# Altium PCB BSPD.PcbDoc
Units mil, origin at the board's own origin, x right, y up, seen from the top; angles counter-clockwise.
Board outline 2490 x 2755 mil, 2 copper layers (Top Layer, Bottom Layer); 27 components, 24 nets, 121 pads, 0 vias.
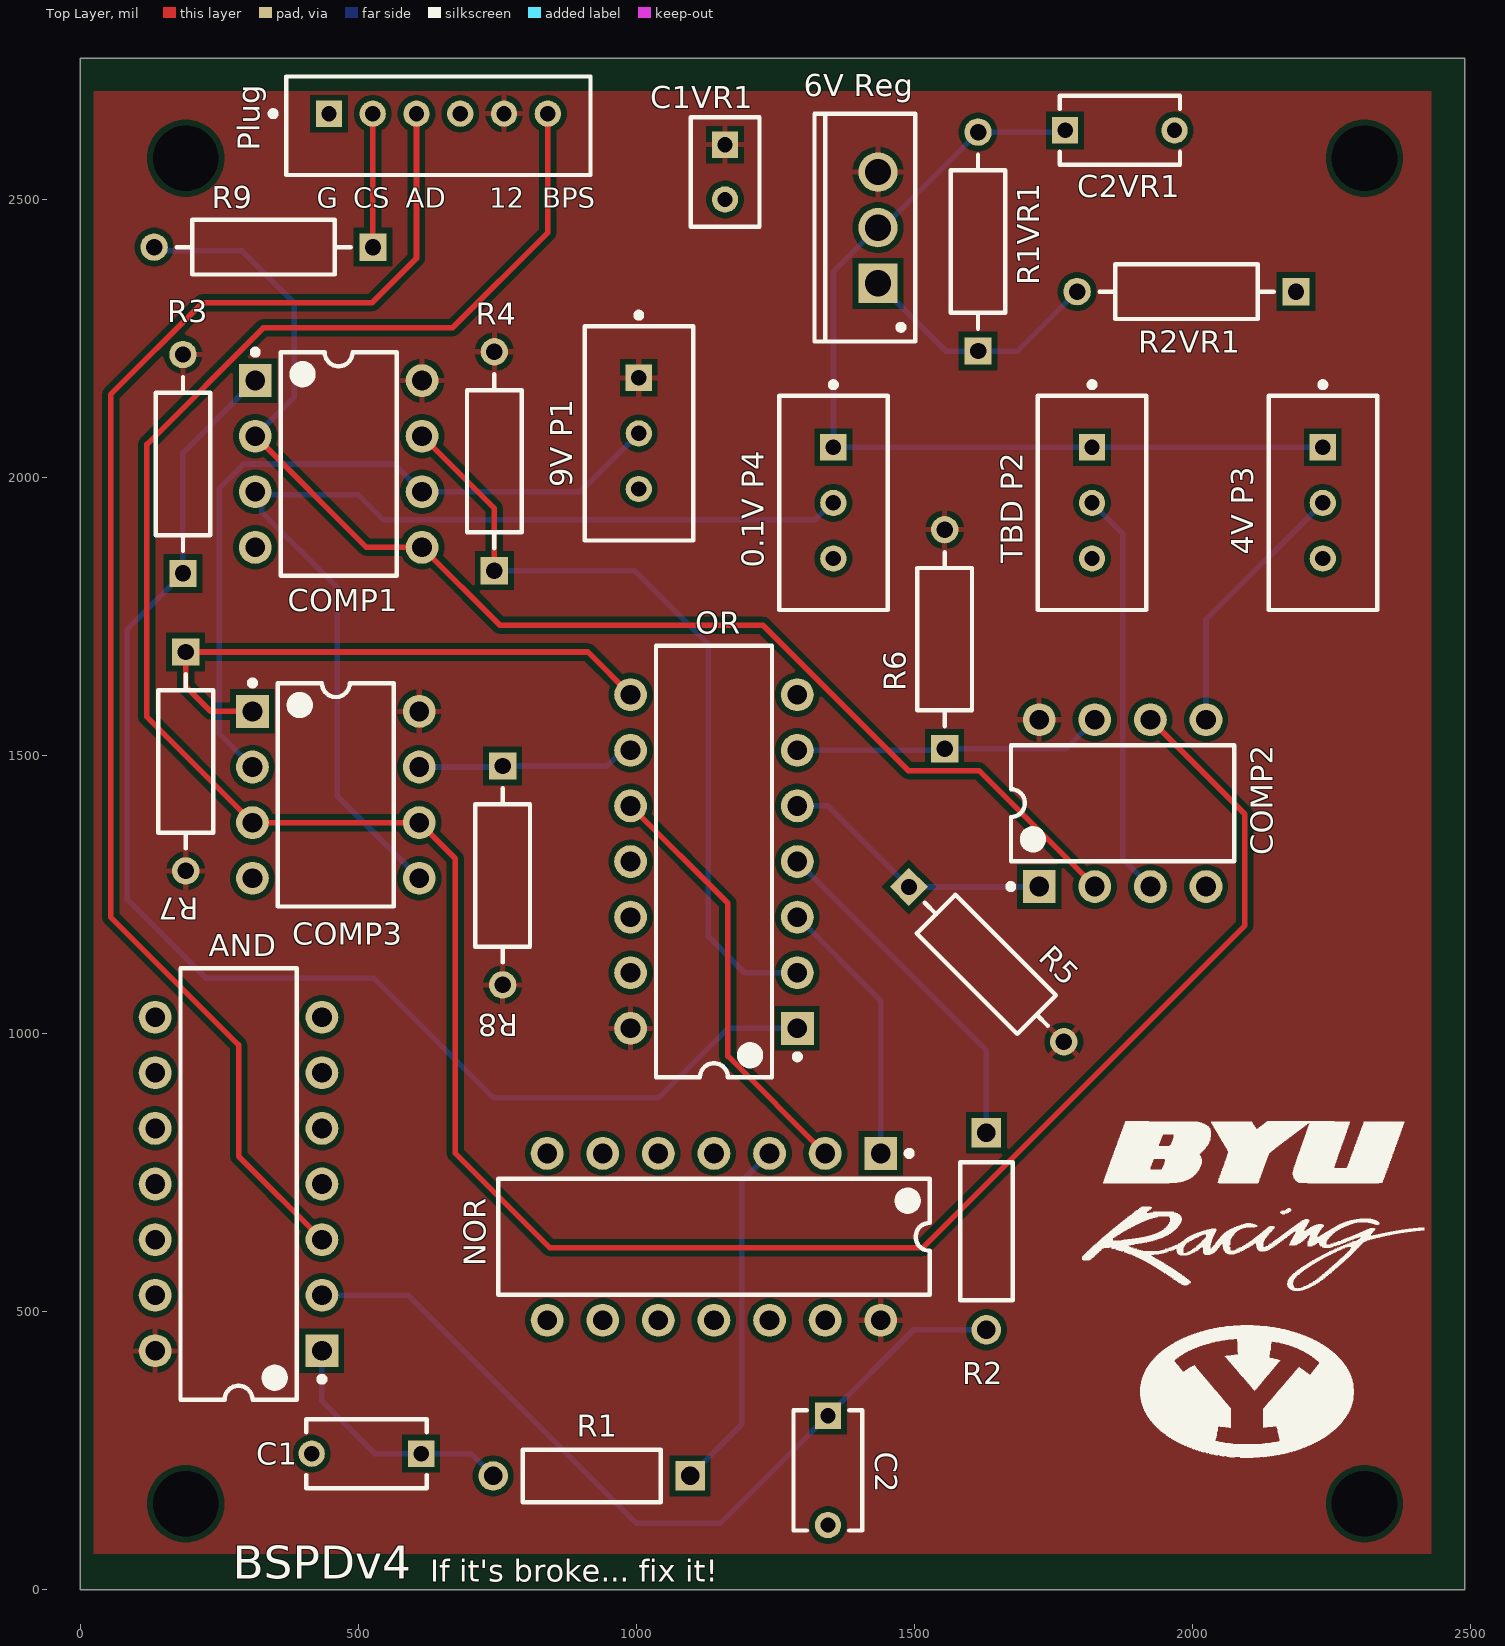
[diagram p0: Top Layer view]
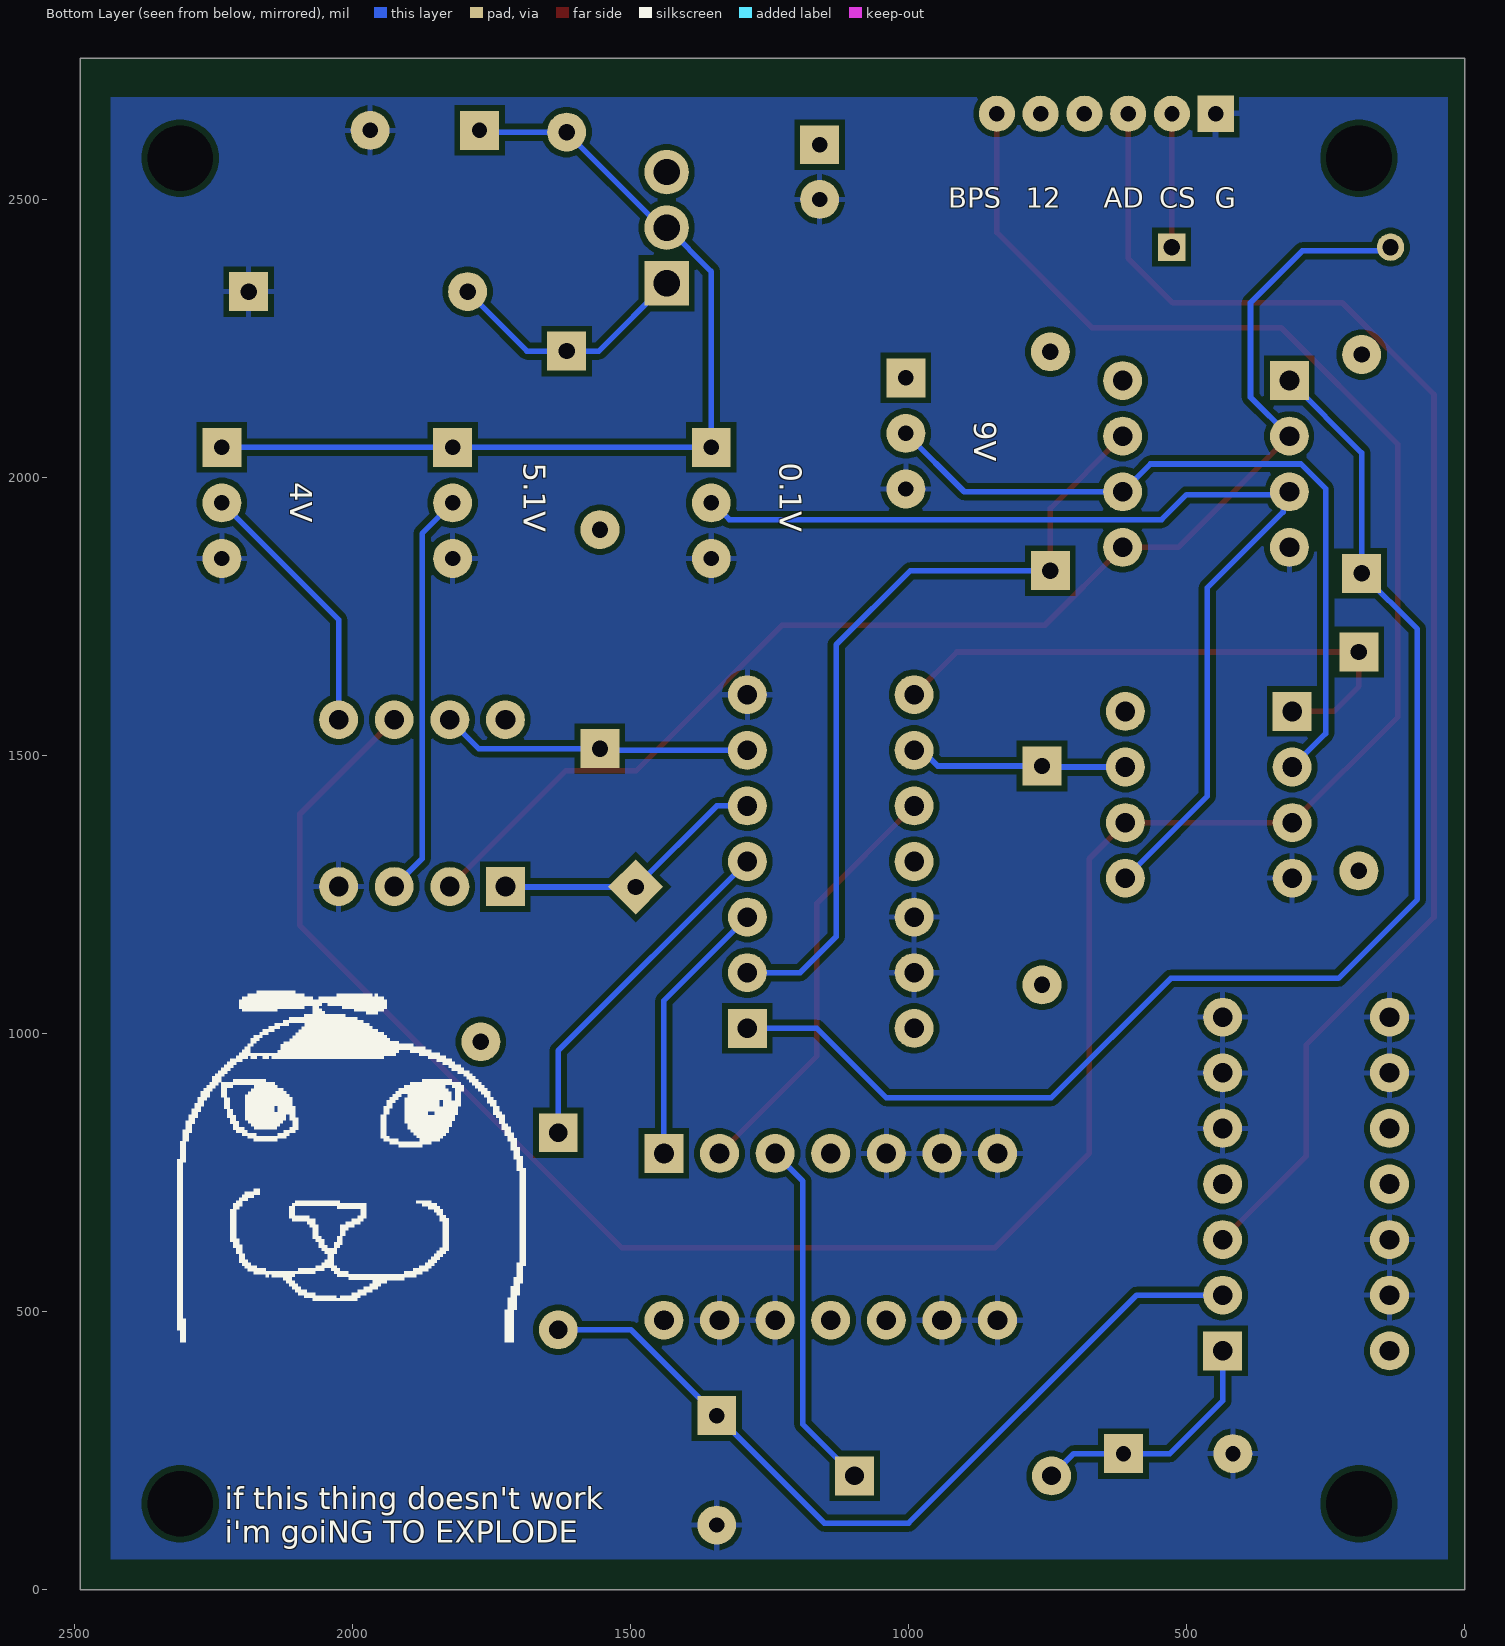
[diagram p1: Bottom Layer view, seen from below]
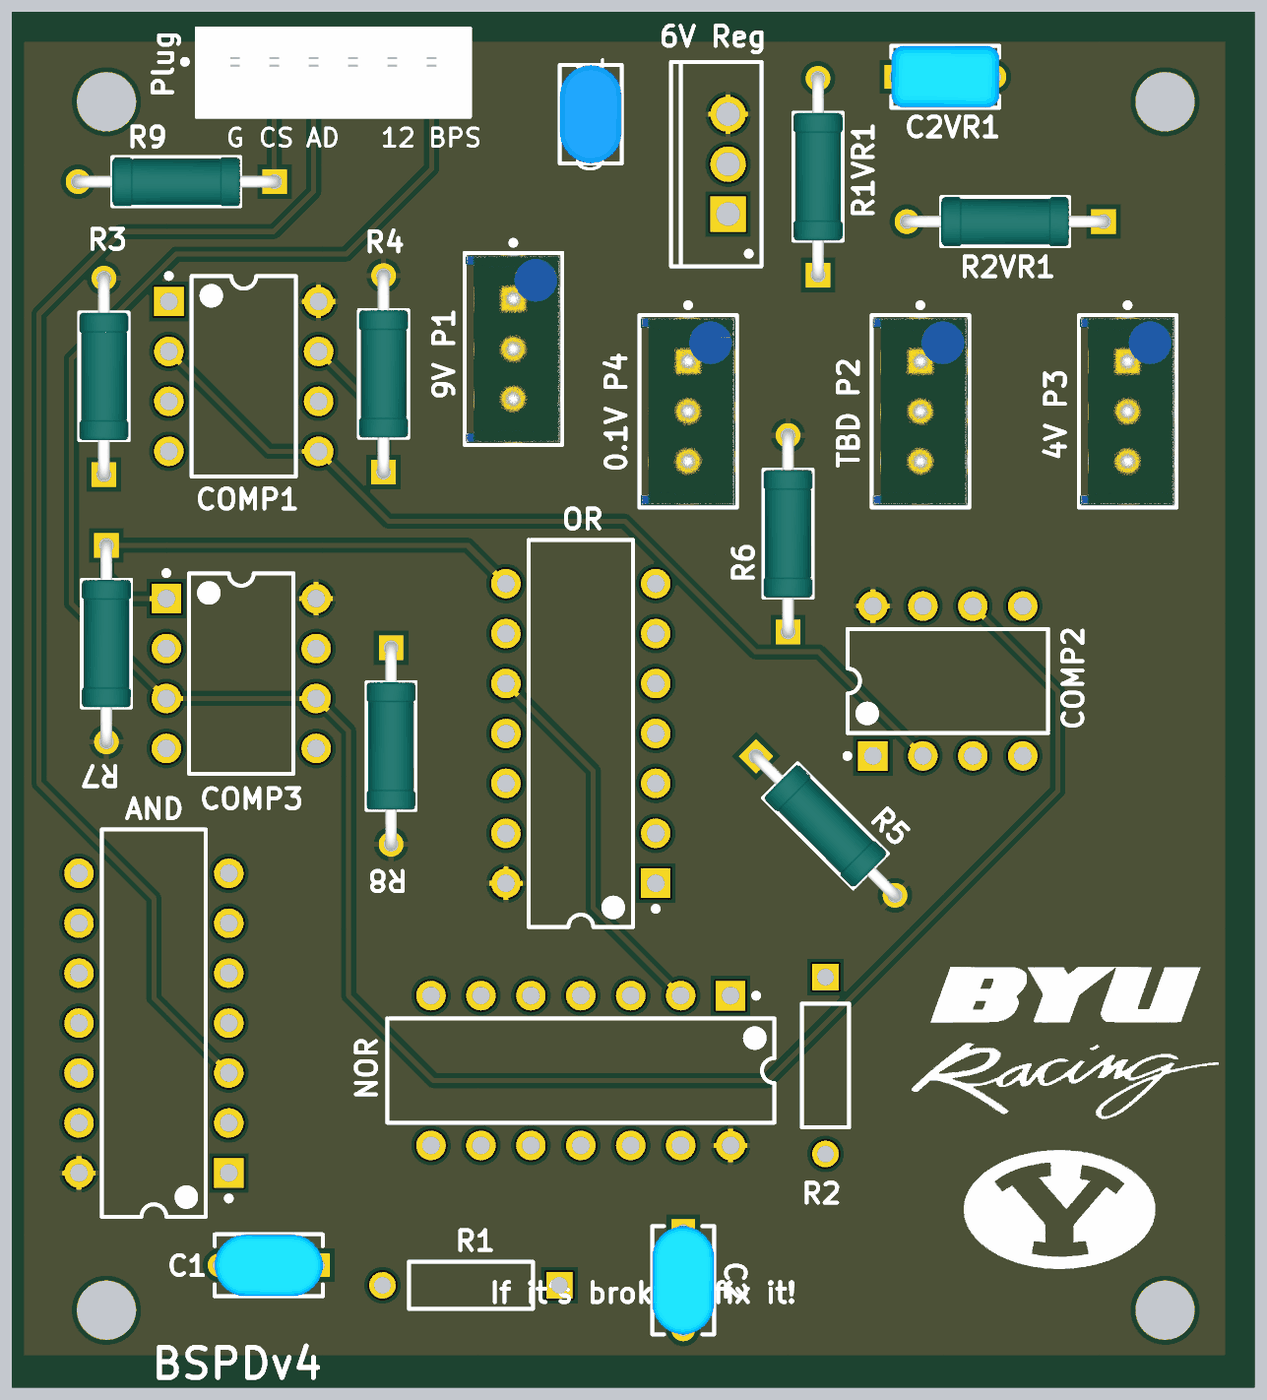
[diagram p2: 3D render of the assembled board from above, using the file's embedded part models]

## Layer stack, top to bottom
Top Solder: solder mask 0.4, Solder Resist, Dk 3.5
Top Layer: signal copper 1.4
Dielectric 1: dielectric 12.6, FR-4, Dk 4.8
Bottom Layer: signal copper 1.4
Bottom Solder: solder mask 0.4, Solder Resist, Dk 3.5

## Board outline
2490,2755 0,2755 0,0 2490,0

## Design rules (kind name [scope] priority, off if disabled: settings)
Clearance [All] p1: gap=10 ignorepadtopadclearanceinfootprint=FALSE ismatrix=TRUE
HoleSize [All] p1: absolutevalues=TRUE maxlimit=200 minlimit=1 maxpercent=80.000 minpercent=20.000
PolygonConnect [All] p1: connectstyle=Relief reliefconductorwidth=10 reliefentries=4 polygonreliefangle="90 Angle" airgapwidth=10
RoutingVias [All] p1: holewidth=28 width=50 viastyle="Through Hole" minholewidth=28 minwidth=50 maxholewidth=28 maxwidth=50
SolderMaskExpansion [All] p1: expansion=4 istentingtop=FALSE
SupplyNets "Schematic Supply Nets" [InNet('GND')] p1: voltage=0.000
Width [All] p1: maxlimit=10 minlimit=10 preferedwidth=10
29 further rules are at their usual default settings.

## Components (designator, comment, footprint, x,y, rotation, side; value= is the part's Value field where it differs from the comment)
"0.1V P4" "3296W-1-103LF" FP-3296W-MFG 1355,1955 r180 top
"4V P3" "3296W-1-103LF" FP-3296W-MFG 2235.2,1955 r180 top
"6V Reg" "LM317P" TO220FP 1435,2450 r90 top
"9V P1" "3296W-1-103LF" FP-3296W-MFG 1005,2080 r180 top
AND "CD4081BE" N0014A 285,730 r180 top
C1 "RDER71H105K2M1H03A" FP-RDE2M1-MFG 515,245 r180 top
C1VR1 ".1uF" FP-RDE1P1-MFG 1160,2550 r270 top
C2 "RDER71H105K2M1H03A" FP-RDE2M1-MFG 1345,215 r270 top
C2VR1 "1uF" FP-RCE2K1-MFG 1870,2625 r0 top
COMP1 "LM393N" P0008A 465,2025 r0 top
COMP2 "LM393N" P0008A 1875,1415 r90 top
COMP3 "LM393N" P0008A 460,1430 r0 top
NOR "CD4001BE" N0014A 1140,635 r270 top
OR "CD4071BE" N0014A 1140,1310 r180 top
Plug "B6B-PH-K-K(LF)(SN)" FP-B6B-PH-K-K_LF_SN-MFG 644.37,2633.35 r180 top
R1 "MFR-25FBF52-1K" RESA60-630X240 920,205 r180 top
R1VR1 "240" FP-MRS25-MFG#1 1615,2425 r90 top
R2 "MFR-25FBF52-1K" RESA60-630X240 1630,645 r270 top
R2VR1 "3k" FP-MRS25-MFG#1 1990,2335 r180 top
R3 "10k" FP-MRS25-MFG#1 185,2025 r90 top
R4 "10k" FP-MRS25-MFG#1 745,2030 r90 top
R5 "10k" FP-MRS25-MFG#1 1630,1125 r315 top
R6 "10k" FP-MRS25-MFG#1 1555,1710 r90 top
R7 "10k" FP-MRS25-MFG#1 190,1490 r270 top
R8 "10k" FP-MRS25-MFG#1 760,1285 r270 top
R9 "100" FP-MRS25-MFG#2 330,2415 r180 top
"TBD P2" "3296W-1-103LF" FP-3296W-MFG 1820.2,1955 r180 top

## Footprints (in the part's own frame and the unit in brackets; to place one, negate y for a bottom-side part, rotate by r counter-clockwise, add the part's x,y. Pads: shape width x height; smd on the part's side, far side on the other; paste and mask are expansions set on the pad)
FP-3296W-MFG [mm]
  rect 1.2x1.2 / inner rect 1.2x1.2 / far side rect 1.778x1.778 hole 0.7 paste-2539.97 mask+0: 1(0.005,-2.54)
  round 1.2 / inner round 1.2 / far side round 1.778 hole 0.7 paste-2539.97 mask+0: 2(0.005,0) 3(0.005,2.54)
  silkscreen extent -2.48,-5.52 2.48,4.89, body extent -2.58,-4.99 2.58,4.99, height 0.25
FP-B6B-PH-K-K_LF_SN-MFG [mm]
  rect 1.2x1.2 / inner rect 1.2x1.2 / far side rect 1.651x1.651 hole 0.7 paste-2539.97 mask+0: 1(5,-0.55)
  round 1.2 / inner round 1.2 / far side round 1.651 hole 0.7 paste-2539.97 mask+0: 2(3,-0.55) 3(1,-0.55) 4(-1,-0.55) 5(-3,-0.55) 6(-5,-0.55)
  silkscreen extent -6.95,-2.25 7.67,2.25, body extent -7.05,-2.35 7.05,2.35, height 0.25
FP-MRS25-MFG#1 [mm]
  rect 1.25x1.25 / inner rect 1.25x1.25 / far side rect 1.778x1.778 hole 0.75 paste-2539.97 mask+0: 1(-5,0)
  round 1.25 / inner round 1.25 / far side round 1.778 hole 0.75 paste-2539.97 mask+0: 2(5,0)
  silkscreen extent -3.97,-1.25 3.98,1.25, body extent -5.72,-1.35 5.72,1.35, height 0.25
FP-MRS25-MFG#2 [mm]
  rect 1.25x1.25 hole 0.75 paste-2539.97 mask+0: 1(-5,0)
  round 1.25 hole 0.75 paste-2539.97 mask+0: 2(5,0)
  silkscreen extent -3.98,-1.25 3.98,1.25, body extent -5.72,-1.35 5.72,1.35, height 0.25
FP-RCE2K1-MFG [mm]
  rect 1.2x1.2 / inner rect 1.2x1.2 / far side rect 1.778x1.778 hole 0.7 paste-2539.97 mask+0: 1(-2.5,0)
  round 1.2 / inner round 1.2 / far side round 1.778 hole 0.7 paste-2539.97 mask+0: 2(2.5,0)
  silkscreen extent -2.75,-1.58 2.75,1.58, body extent -3.2,-1.68 3.2,1.68, height 0.25
FP-RDE1P1-MFG [mm]
  rect 1.2x1.2 / inner rect 1.2x1.2 / far side rect 1.778x1.778 hole 0.7 paste-2539.97 mask+0: 1(-1.25,0)
  round 1.2 / inner round 1.2 / far side round 1.778 hole 0.7 paste-2539.97 mask+0: 2(1.25,0)
  silkscreen extent -2.5,-1.58 2.5,1.58, body extent -2.6,-1.68 2.6,1.68, height 0.25
FP-RDE2M1-MFG [mm]
  rect 1.2x1.2 / inner rect 1.2x1.2 / far side rect 1.778x1.778 hole 0.7 paste-2539.97 mask+0: 1(-2.5,0)
  round 1.2 / inner round 1.2 / far side round 1.778 hole 0.7 paste-2539.97 mask+0: 2(2.5,0)
  silkscreen extent -2.75,-1.58 2.75,1.58, body extent -3.2,-1.68 3.2,1.68, height 0.25
N0014A [mm] "DIP, 14-Leads, Body 19.7x6.6mm, Pitch 2.54mm"
  rect 1.5x1.5 / inner rect 1.5x1.5 / far side rect 1.778x1.778 hole 0.9: 1(-3.81,7.62)
  round 1.5 / inner round 1.5 / far side round 1.778 hole 0.9: 2(-3.81,5.08) 3(-3.81,2.54) 4(-3.81,0) 5(-3.81,-2.54) 6(-3.81,-5.08) 7(-3.81,-7.62) 8(3.81,-7.62) 9(3.81,-5.08) 10(3.81,-2.54) 11(3.81,0) 12(3.81,2.54) 13(3.81,5.08) 14(3.81,7.62)
  silkscreen extent -3.94,-9.85 2.65,9.85, body extent -3.95,-9.85 3.95,9.85, height 5.08
P0008A [mm] "DIP, 8-Leads, Body 10.15x6.6mm, Pitch 2.54mm"
  rect 1.5x1.5 / inner rect 1.5x1.5 / far side rect 1.778x1.778 hole 0.9: 1(-3.81,3.81)
  round 1.5 / inner round 1.5 / far side round 1.778 hole 0.9: 2(-3.81,1.27) 3(-3.81,-1.27) 4(-3.81,-3.81) 5(3.81,-3.81) 6(3.81,-1.27) 7(3.81,1.27) 8(3.81,3.81)
  silkscreen extent -3.93,-5.1 2.65,5.23, body extent -3.95,-5.07 3.95,5.07, height 5.08
RESA60-630X240 [mm] "Axial Resistor, 2-Leads, Dia 2.4mm, Body Length 6.3mm"
  rect 1.35x1.35 / inner rect 1.35x1.35 / far side rect 1.778x1.778 hole 0.85: 1(-4.5,0)
  round 1.35 / inner round 1.35 / far side round 1.778 hole 0.85: 2(4.5,0)
  silkscreen extent -3.15,-1.2 3.15,1.2, body extent -3.15,-1.2 3.15,1.2, height 2.4
TO220FP [mm] "TO, Thru-Hole, Vertical, Heatsink Mounted; 3 In-Line Leads; Pitch 2.54 mm"
  rect 1.8x1.8 / inner rect 1.8x1.8 / far side rect 2.032x2.032 hole 1.2: 1(-2.54,0)
  round 1.8 / inner round 1.8 / far side round 2.032 hole 1.2: 2(0,0) 3(2.54,0)
  silkscreen extent -5.2,-1.7 5.2,2.9, body extent -5.25,-1.75 5.25,2.95, height 20

## Part data
"0.1V P4" "4V P3" "9V P1" "TBD P2": library part CMP-1747-00001-8, "TRIMMER 10K OHM 0.5W PC PIN TOP", Color=Blue, Insulation Resistance=1GR, Max Operating Temperature=125°C, Max Power Dissipation=500mW, Min Operating Temperature=-55°C, Package Quantity=50, Resistance=10kR, Resistance Tolerance=10%, Resistor Type=Cermet, Temperature Coefficient=100ppm/°C, Contact Plating=Tin, Depth=4.83mm, Height=11.55mm, Lead Free="Lead Free", Length=9.53mm, Military Standard=Not, Mount="Through Hole", Number of Turns=25, Packaging=Rail/Tube, Power Rating=500mW, Radiation Hardening=No, Reach SVHC Compliant=Yes, RoHS Compliant=Yes, Series=3296, Taper=Linear, Technology=CERMET, Termination=Pin, Tolerance=10%, Weight=0.03oz, Width=9.53mm
"6V Reg": library part CMP-0244-00425-1, "1.5A, 1.2V to 37V Adjustable Voltage Regulator, 3-Pin TO-220FP", ComponentLink1Description="Manufacturer URL", ComponentLink1URL=http://www.st.com, ComponentLink2Description=Datasheet, ComponentLink2URL=http://www.st.com/internet/com/TECHNICAL_RESOURCES/TECHNICAL_LITERATURE/DATASHEET/CD00000455.pdf, DatasheetVersion=1/11/2011, PackageDescription="TO, Thru-Hole, Vertical, Heatsink Mounted; 3 In-Line Leads; Pitch 2.54 mm", PackageReference=TO220FP, PackageVersion=2011
AND: library part CMP-0777-00273-3, "CMOS Quad 2-Input AND Gate, N0014A, TUBE", F @ Nom Voltage(Max)(Mhz)=8, Generic Part Number=CD4081B, ICC @ Nom Voltage(Max)(mA)=0.015, Manufacturer="Texas Instruments", Operating Temperature Range(C)="-55 to 125", Rating=Military, tpd @ Nom Voltage(Max)(ns)=12, Voltage(Nom)(V)=10, Bits(#)=4, DatasheetVersion=SCHS057C, Input Type=CMOS, Output Drive (IOL/IOH)(Max)(mA)=-6.8/6.8, Output Type=CMOS, PackageReference=N0014A, Schmitt Trigger=No, Technology Family=CD4000, VCC(Max)(V)=18, VCC(Min)(V)=3
C1 C2: library part CMP-06035-045612-1, "Ceramic Capacitor 1uF ±10% 50V X7R Radial", Capacitance=1uF, Case/Package=Radial, Dielectric=X7R, Max Operating Temperature=125°C, Min Operating Temperature=-55°C, Package Quantity=2000, Resistor Type=Ceramic, Tolerance=10%, Voltage Rating=50V, Height=4mm, Height - Seated (Max)=0.236inch, Lead Diameter=0.5mm, Lead Free="Lead Free", Lead Pitch=0.197inch, Lead/Base Style=Kinked, Length=0.217inch, Mount="Through Hole", Packaging="Tape and Reel", Termination=Radial, Voltage Rating (DC)=50V, Width=4mm
C1VR1: library part CMP-06035-033965-1, "Ceramic Capacitor 100nF ±10% 100V X7R Radial", Capacitance=100nF, Case/Package=Radial, Dielectric=X7R, Max Operating Temperature=125°C, Min Operating Temperature=-55°C, Package Quantity=1, Resistor Type=Ceramic, Tolerance=10%, Voltage Rating=100V, Height=3.5mm, Height - Seated (Max)=0.197inch, Lead Diameter=0.5mm, Lead Free="Lead Free", Lead Pitch=0.098inch, Lead/Base Style="Formed Leads", Length=0.177inch, Mount="Through Hole", Packaging="Tape and Reel", Termination=Radial, Voltage Rating (DC)=100V, Width=0.124inch
C2VR1: library part CMP-06035-007361-1, "Cap Ceramic Monolithic 1uF 100V 10% Thru-Hole Bulk", Case/Package=Radial, Dielectric=X7R, Max Operating Temperature=125°C, Min Operating Temperature=-55°C, Package Quantity=2000, Ratings=AEC-Q200, Resistor Type=Ceramic, Tolerance=10%, Voltage Rating=100V, Capacitance=1uF, Height=4mm, Height - Seated (Max)=0.157inch, Lead Diameter=0.5mm, Lead Free="Lead Free", Lead Pitch=0.197inch, Lead/Base Style="Formed Leads", Length=0.217inch, Mount="Through Hole", Packaging="Tape and Reel", Termination=Radial, Voltage Rating (DC)=100V, Width=0.124inch
COMP1 COMP2 COMP3: library part CMP-0055-00119-3, "Low Power Low Offset Voltage Dual Comparator, 8-pin MDIP", Manufacturer="Texas Instruments", Package Reference=P0008A, PackageTopMarking=NSUZXYTTE#*LM*393N, PowerWise=N, Code_JEDEC=MS-001-BA, ComponentLink1Description="Datasheet URL", ComponentLink1URL=http://www.ti.com/general/docs/lit/getliterature.tsp?genericPartNumber=LM393-N&fileType=pdf, CompType=Amplifiers, PackageDescription="MDIP, .365 x .250 x .130in, 8 Lead, .100in Pitch", PinCount=8, RoHS=N
NOR: library part CMP-0806-00193-3, "CMOS Quad 2-Input NOR Gate, N0014A, TUBE", F @ Nom Voltage(Max)(Mhz)=8, Generic Part Number=CD4001B, ICC @ Nom Voltage(Max)(mA)=0.015, Manufacturer="Texas Instruments", Operating Temperature Range(C)="-55 to 125", Rating=Military, tpd @ Nom Voltage(Max)(ns)=120, Voltage(Nom)(V)=10, Bits(#)=4, Code_JEDEC=MS-001, DatasheetVersion=SCHS015C, Input Type=CMOS, Output Drive (IOL/IOH)(Max)(mA)=1.5/-1.5, Output Type=CMOS, PackageReference=N0014A, PackageVersion=http://www.ti.com/lit/ml/mpdi002c/mpdi002c.pdf, VCC(Max)(V)=18, VCC(Min)(V)=3
OR: library part CMP-1573-00144-3, "CMOS Quad 2-Input OR Gate, N0014A, TUBE", F @ Nom Voltage(Max)(Mhz)=8, Generic Part Number=CD4071B, ICC @ Nom Voltage(Max)(mA)=0.015, Manufacturer="Texas Instruments", Operating Temperature Range(C)="-55 to 125", Rating=Military, tpd @ Nom Voltage(Max)(ns)=120, Voltage(Nom)(V)=10, Bits(#)=4, Code_JEDEC=MS-001, DatasheetVersion=SCHS056D, Input Type=CMOS, Output Drive (IOL/IOH)(Max)(mA)=1.5/-1.5, Output Type=CMOS, PackageReference=N0014A, PackageVersion=http://www.ti.com/lit/ml/mpdi002c/mpdi002c.pdf, VCC(Max)(V)=18, VCC(Min)(V)=3
Plug: library part CMP-17439-000495-1, "PH Series 6 Position 2 mm Pitch Through Hole Top Entry Shrouded Header", Lead Free="Lead Free"
R1 R2: library part CMP-1659-00075-1, "Axial Resistor, 1 KOhm, +/- 1%, 250 mW, -55 to 155 degC, 2-Pin THD, RoHS, Bulk", Case\Package=Axial, Max Operating Temperature="155 degC", Min Operating Temperature="-55 degC", Package Quantity=200, Power Rating="250 mW", Resistance="10 kohm", Tolerance=1%, Voltage Rating="250 V", ComponentLink1Description="Manufacturer URL", ComponentLink1URL=http://www.yageo.com/, ComponentLink2Description=Datasheet, ComponentLink2URL=http://www.yageo.com/documents/recent/Yageo%20LR_MFR_2013.pdf, DatasheetVersion=Apr-13, Length="0.248 inch", PackageDescription="2-Pin Axial Lead, Dia 2.4 mm, Body Length 6.3 mm", PackageReference=MFR-25, Packaging=Bulk, RoHSCompliant=true
R1VR1 R2VR1 R3 R4 R5 R6 R7 R8 R9: library part CMP-00030-42757237-1, "MRS25000C1000FRP00 Resistor, 100 Ohm, ± 1%, 600 mW, Axial Leaded, Metal Film (Thin Film), Professional", Case/Package=Axial, Max Operating Temperature=155°C, Max Power Dissipation=600mW, Min Operating Temperature=-55°C, Resistance=100Ω, Temperature Coefficient=50ppm/°C, Tolerance=1%, Voltage Rating=350V, Composition="Metal Film, Thin Film", Contact Plating=Tin, Diameter=2.5mm, Lead Diameter=600µm, Lead Free="Lead Free", Length=6.5mm, Military Standard=Not, Mount="Through Hole", NexarPartId=42757237, Number of Pins=2, Number of Terminations=2, Packaging="Tape & Reel (TR)", Power Rating=600mW, Radiation Hardening=No, REACH SVHC=Unknown, RoHS=Compliant, Schedule B="8533210090, 8533210090", Termination=Axial, Voltage Rating (DC)=350V, Width=2.5mm

## Free pads (board coordinates)
  round 60 / inner round 60 / far side round 70 hole 118.11: 4(190,155) 4(190,2575) 4(2310,155) 4(2310,2575)

## Nets (pads, with @x,y where several pads share a name; then routed paths per layer and width w, separated by ;. In a path a pad name is that pad's centre, name@x,y a point inside that pad or via, vN(x,y) a via of type N, cw(c..) or ccw(c..) an arc to the next point about the centre after c; other vN are vias at no path point)
0.1V: "0.1V P4.2" COMP1.3 COMP3.5 | length 1883.1
  Bottom Layer w10: COMP1.3 COMP1.3@320,1970 ; COMP3.5 462.5,1427.5 462.5,1802.5 326.48,1938.52 326.48,1963.52 COMP1.3@320,1970 ; 1354.8,1955 1352.38,1955 1322.38,1925 545,1925 500,1970 COMP1.3@320,1970
4V: "4V P3.2" COMP2.5 | length 477
  Bottom Layer w10: COMP2.5 2025,1745 2235,1955
5.1V: "TBD P2.2" COMP2.3 | length 733.5
  Bottom Layer w10: 1820,1955 1875,1900 1875,1315 COMP2.3
6V: "0.1V P4.1" "4V P3.1" "6V Reg.2" "TBD P2.1" C2VR1.1 R1VR1.2 | length 1714.1
  Bottom Layer w10: R1VR1.2@1615.93,2621.85 1444.07,2450 1435,2450 1433.79,2450 1355,2371.21 1355,2055.2 1354.8,2055 1820,2055 ; R1VR1.2@1620,2621.85 R1VR1.2 1768.43,2621.85 C2VR1.1 ; 1830,2055 2235,2055
9V: "9V P1.2" COMP1.6 COMP3.2 | length 1362.9
  Bottom Layer w10: COMP3.2 250,1540 250,1980.71 294.29,2025 565,2025 COMP1.6 899.8,1975 1004.8,2080
12V: "6V Reg.3" "9V P1.1" AND.14 C1VR1.1 COMP1.8 COMP2.8 COMP3.8 NOR.14 OR.14 Plug.5 R3.2 R4.2 R5.2 R6.2 R7.2 R8.2
"Accumulator Disconnect": AND.3 Plug.3 | length 2588.9
  Top Layer w10: AND.3 285,780 285,980 55,1210 55,2150 220,2315 525,2315 605,2395 Plug.3
"Brake Pressure Sensor": COMP2.6 COMP3.3 COMP3.6 Plug.6 | length 4944.8
  Top Layer w10: Plug.6 841.22,2441.22 670,2270 329.73,2270 120,2060.27 120,1570 COMP3.3 COMP3.6 675,1315 675,785 845,615 1515,615 2095,1195 2095,1395 COMP2.6
CMP1A_OUT: COMP1.1 OR.1 R3.1 | length 2433
  Bottom Layer w10: COMP1.1 185,2045 R3.1 85,1728.15 85,1241.94 226.94,1100 528.47,1100 743.47,885 1040,885 1165,1010 OR.1
CMP1B_OUT: COMP1.7 OR.2 R4.1 | length 1447.8
  Top Layer w10: COMP1.7 745,1945 R4.1
  Bottom Layer w10: R4.1 996.85,1833.15 1130,1700 1130,1175 1195,1110 OR.2
CMP2A_OUT: COMP2.1 OR.5 R5.1 | length 496.4
  Bottom Layer w10: OR.5@1290.71,1410 OR.5 1345,1410 R5.1 1724.19,1264.19 COMP2.1
CMP2B_OUT: COMP2.7 OR.6 R6.1 | length 557.8
  Bottom Layer w10: OR.6 1551.85,1510 R6.1 1773.15,1513.15 COMP2.7
CMP3A_OUT: COMP3.1 OR.8 R7.1 | length 1032.3
  Top Layer w10: COMP3.1 235,1580 190,1625 R7.1 913.15,1686.85 OR.8
CMP3B_OUT: COMP3.7 OR.9 R8.1 | length 392.4
  Bottom Layer w10: COMP3.7 758.15,1480 R8.1 947.44,1481.85 975.59,1510 OR.9
"Current Sensor": Plug.2 R9.1 | length 240.2
  Top Layer w10: R9.1@526.26,2415.59 Plug.2
  Bottom Layer w10: R9.1@526.26,2415.59 R9.1
"Current Sensor_V": COMP1.2 COMP1.5 COMP2.2 R9.2 | length 2407.8
  Top Layer w10: COMP1.2 515,1875 COMP1.5 755,1735 1227.97,1735 1489.43,1473.54 1616.46,1473.54 COMP2.2
  Bottom Layer w10: R9.2 139.69,2408.46 291.54,2408.46 385,2315 385,2145 COMP1.2
GND: "0.1V P4.3" "4V P3.3" "9V P1.3" "TBD P2.3" AND.5 AND.6 AND.7 AND.8 AND.9 AND.12 AND.13 C1.2 C1VR1.2 C2.2 C2VR1.2 COMP1.4 COMP2.4 COMP3.4 NOR.5 NOR.6 NOR.7 NOR.8 NOR.9 NOR.12 NOR.13 OR.7 OR.12 OR.13 Plug.1 R2VR1.1
NORA_OUT: NOR.3 R1.1 | length 639.2
  Bottom Layer w10: R1.1 1190,297.83 1190,735 NOR.3
ORA_OUT: NOR.1 OR.3 | length 487.1
  Bottom Layer w10: OR.3 1440,1060 NOR.1
ORB_OUT: OR.4 R2.1 | length 628.7
  Bottom Layer w10: OR.4 1630,970 R2.1
ORC_OUT: NOR.2 OR.10 | length 770
  Top Layer w10: OR.10 1165,1235 1165,960 NOR.2
R1_OUT: AND.1 C1.1 R1.2 | length 453.8
  Bottom Layer w10: AND.1 435,340 530,245 C1.1 702.83,245 R1.2
R2_OUT: AND.2 C2.1 R2.2 | length 1508.9
  Bottom Layer w10: AND.2 590,530 1000,120 1151.57,120 C2.1 1499.41,467.83 R2.2
VR1_ADJ: "6V Reg.1" R1VR1.1 R2VR1.2 | length 452.9
  Bottom Layer w10: 1435,2350 1556.85,2228.15 R1VR1.1 1686.3,2228.15 R2VR1.2
pads on no net: AND.4 AND.10 AND.11 NOR.4 NOR.10 NOR.11 OR.11 Plug.4

## Polygon pours and split planes (outlines as drawn)
GND on Bottom Layer "NONET_L-01_P-001" (solid, pour order 0): 30,2685 2435,2685 2435,55 30,55 30,2340
12V on Top Layer "NONET_L-01_P-001" (solid, pour order 1): 25,2695 2430,2695 2430,65 25,65 25,2350

## Silkscreen, mask and mechanical layers (free items; w line width, h text height)
Top Overlay:
  drawing of 5 lines, arcs and shapes, not listed
  text "G" at 426,2486 h36
  text "CS" at 491,2486 h36
  text "AD" at 586,2486 h36
  text "12" at 736,2486 h36
  text "BPS" at 831,2486 h36
  text "BSPDv4" at 275,20 h60
  text "If it's broke... fix it!" at 630.2,15 h40
Bottom Overlay:
  drawing of 4 lines, arcs and shapes, not listed
  text "G" at 449,2486 h36
  text "CS" at 549,2486 h36
  text "AD" at 649,2486 h36
  text "12" at 789,2486 h36
  text "BPS" at 929,2486 h36
  text "9V" at 882,2102 h40 r90
  text "0.1V" at 1232,2027 h40 r90
  text "5.1V" at 1692,2027 h40 r90
  text "4V" at 2112,1992 h40 r90
  text "if this thing doesn't work / i'm goiNG TO EXPLODE" at 2230,85 h40